# Altium PCB lighthouse_sensor.PcbDoc
Units mil, origin at the board's own origin, x right, y up, seen from the top; angles counter-clockwise.
Board outline 1300 x 600 mil, 2 copper layers (Top Layer, Bottom Layer); 50 components, 24 nets, 111 pads, 51 vias.
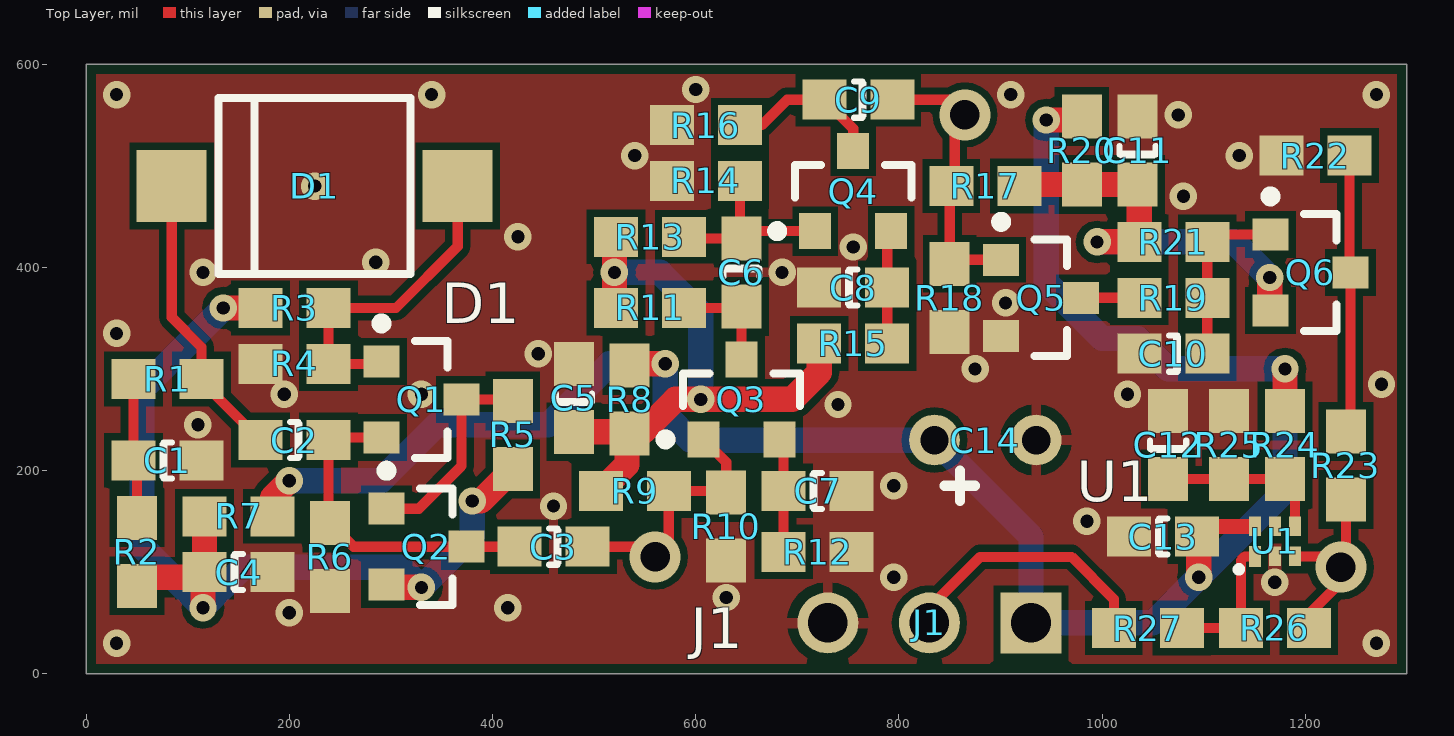
[diagram p0: Top Layer view]
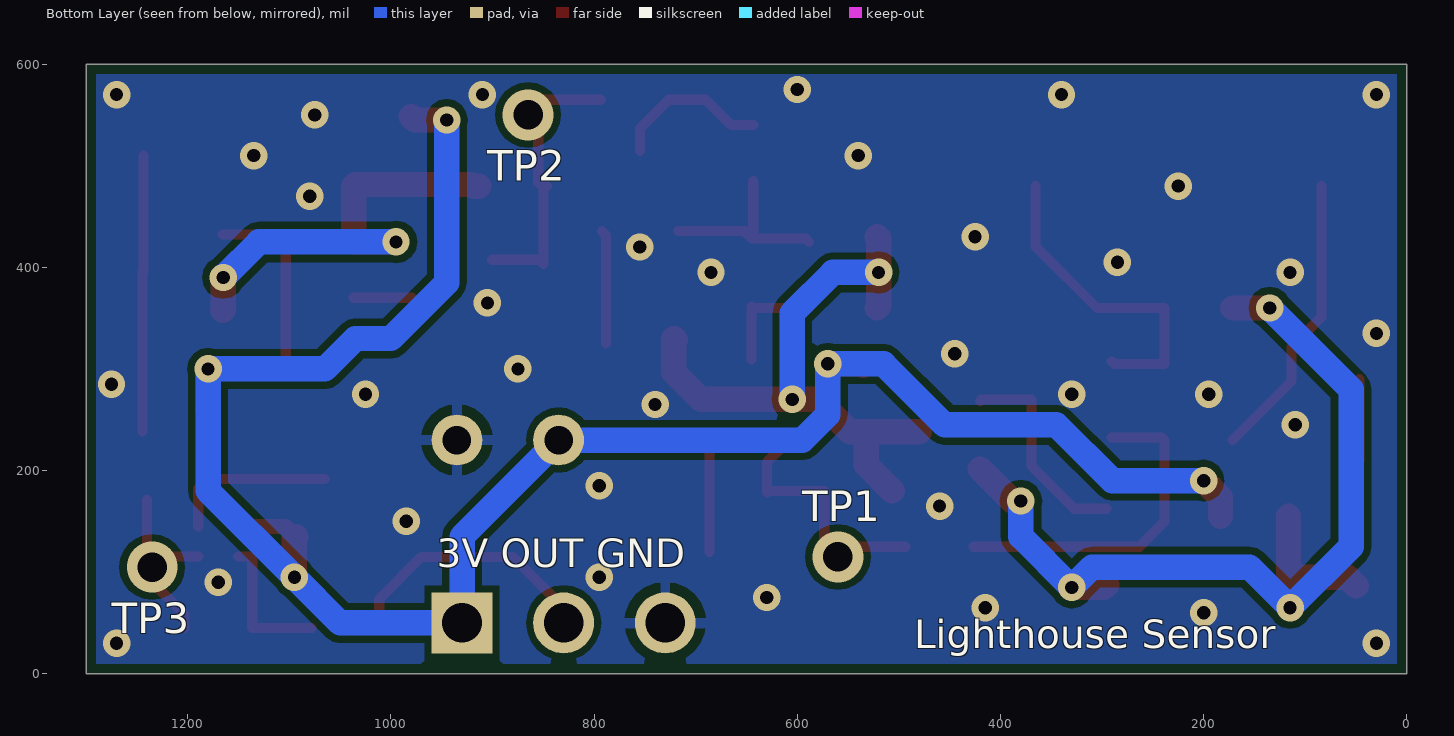
[diagram p1: Bottom Layer view, seen from below]

## Layer stack, top to bottom
Top Solder: solder mask 0.4, Solder Resist, Dk 3.5
Top Layer: signal copper 1.4
Dielectric1: dielectric 12.6, FR-4, Dk 4.8
Bottom Layer: signal copper 1.4
Bottom Solder: solder mask 0.4, Solder Resist, Dk 3.5

## Board outline
1300,0 0,0 0,600 1300,600

## Design rules (kind name [scope] priority, off if disabled: settings)
AssemblyTestPointUsage [All] p1: valid=2
Clearance [All] p1: gap=7
ComponentClearance [(Name <> 'J1') vs (Name <> 'J1')] p1: gap=5 collisioncheckmode=3 verticalgap=10 showdistances=FALSE
DiffPairsRouting [All] p1: maxlimit=7 minlimit=7 mostfreqgap=7 toplayer_minwidth=15 toplayer_maxwidth=15 toplayer_prefwidth=15 bottomlayer_minwidth=15 bottomlayer_maxwidth=15 bottomlayer_prefwidth=15 maxuncoupledlength=500
FabricationTestPointUsage [All] p1: valid=2 allowmultiple=FALSE
HoleSize [All] p1: absolutevalues=TRUE maxlimit=250 minlimit=13 maxpercent=80.000 minpercent=20.000
MinimumAnnularRing [All] p1: minimumring=7
PolygonConnect PolygonConnect_Thermal [(InComponentClass('Thermal'))] p1: connectstyle=Relief reliefconductorwidth=10 reliefentries=4 polygonreliefangle="90 Angle" airgapwidth=10
PolygonConnect [All] p2: connectstyle=Direct reliefconductorwidth=10 reliefentries=4 polygonreliefangle="90 Angle" airgapwidth=10
RoutingVias [All] p1: holewidth=13 width=27 viastyle="Through Hole" minholewidth=13 minwidth=27 maxholewidth=60 maxwidth=80
SilkToSolderMaskClearance SilkscreenOverComponentPads [IsPad] p1: minsilkscreentomaskgap=10 clearancetoexposedcopper=TRUE
SolderMaskExpansion [All] p1: expansion=4
Width [All] p1: maxlimit=60 minlimit=7 preferedwidth=7
24 further rules are at their usual default settings.

## Classes and differential pairs
component class Thermal: C14 J1

## Components (designator, comment, footprint, x,y, rotation, side; value= is the part's Value field where it differs from the comment)
C1 "C0603" 0603 80,210 r0 top
C2 "C0603" 0603 205,230 r180 top
C3 "C0603" 0603 460,125 r180 top
C4 "C0603" 0603 150,100 r0 top
C5 "C0603" 0603 480,271.54 r90 top
C6 "C0603" 0603 645,395 r270 top
C7 "C0603" 0603 720,180 r0 top
C8 "C0603" 0603 755,380 r0 top
C9 "C0603" 0603 760,565 r180 top
C10 "C0603" 0603 1070,315 r180 top
C11 "C0603" 0603 1035,515 r90 top
C12 "C0603" 0603 1065,225.24 r90 top
C13 "C0603" 0603 1060,135 r0 top
C14 "Electrolytic Capacitor" Capacitor 835,230 r0 top
D1 "VBPW34FAS" VBPW34FAS 225,480 r0 top
J1 "3P_0.1_SIP" 3P_0.1_SIP 930,50 r270 top
Q1 "MMBT3904LT3G" ONSC-SOT-23-3-318-08_V 330,270 r0 top
Q2 "MMBT3906LT3G" ONSC-SOT-23-3-318-08_V 335,125 r0 top
Q3 "MMBT3904LT3G" ONSC-SOT-23-3-318-08_V 645,270 r90 top
Q4 "MMBT3906LT3G" ONSC-SOT-23-3-318-08_V 755,475 r90 top
Q5 "MMBT3904LT3G" ONSC-SOT-23-3-318-08_V 940,370 r0 top
Q6 "MMBT3906LT3G" ONSC-SOT-23-3-318-08_V 1205,395 r0 top
R1 "10K" 3-0603 80,290 r180 top
R2 "10K" 3-0603 50,120 r90 top
R3 "8.2K" 3-0603 205,360 r180 top
R4 "8.2K" 3-0603 205,305 r0 top
R5 "1.5K" 3-0603 420,235 r270 top
R6 "560" 3-0603 240,115 r90 top
R7 "33" 3-0603 150,155 r180 top
R8 "33" 3-0603 535,270 r270 top
R9 "15K" 3-0603 540,180 r0 top
R10 "6.8K" 3-0603 630,145 r90 top
R11 "2.7K" 3-0603 555,360 r0 top
R12 "1K" 3-0603 720,120 r180 top
R13 "6.8K" 3-0603 555,430 r0 top
R14 "15K" 3-0603 610,485 r0 top
R15 "1K" 3-0603 755,325 r0 top
R16 "2.7K" 3-0603 610,540 r0 top
R17 "100K" 3-0603 885,480 r180 top
R18 "12K" 3-0603 850,370 r90 top
R19 "56K" 3-0603 1070,370 r0 top
R20 "33" 3-0603 980,515 r270 top
R21 "56K" 3-0603 1070,425 r0 top
R22 "5.6K" 3-0603 1210,510 r0 top
R23 "1.2K" 3-0603 1240,205 r90 top
R24 "100K" 3-0603 1180,225.24 r270 top
R25 "100K" 3-0603 1125,225.24 r270 top
R26 "100K" 3-0603 1170,45.24 r0 top
R27 "33" 3-0603 1045,45 r0 top
U1 "TC75S70L6X" MP6C 1170,130.24 r90 top

## Footprints (in the part's own frame and the unit in brackets; to place one, negate y for a bottom-side part, rotate by r counter-clockwise, add the part's x,y. Pads: shape width x height; smd on the part's side, far side on the other; paste and mask are expansions set on the pad)
3-0603 [mm] "Chip Resistor; Body 1.6 x 0.9 mm (LxW typ)"
  rect 1.1x1 smd: 1(-0.85,0) 2(0.85,0)
3P_0.1_SIP [mil]
  rect 60x60 hole 39: 1(0,0)
  round 60 hole 39: 2(0,-100) 3(0,-200)
0603 [mm] "Chip Capacitor; Body 1.6 x 0.8 mm (LxW typ)"
  rect 1.1x1 smd: 1(-0.85,0) 2(0.85,0)
  silkscreen extent -0.1,-0.45 0.11,0.45
Capacitor [mil]
  round 50 hole 28: 1(0,0) 2(100,0)
  silkscreen extent 10,-60 40,-30
MP6C [mm]
  rect 0.52x0.3 smd: 1(-0.375,0.5)
  rect 0.49x0.3 smd: 2(-0.375,0) 3(-0.375,-0.5) 4(0.375,-0.5) 5(0.375,0) 6(0.375,0.5)
  silkscreen extent -0.73,0.87 -0.67,0.93
ONSC-SOT-23-3-318-08_V [mm] "SOT23, 3-Leads, Body 2.92x1.3mm, Pitch 0.95mm"
  rect 0.9x0.8 smd: 1(-1,0.95) 2(-1,-0.95) 3(1,0)
  silkscreen extent -1.12,-1.46 0.65,2.02, body extent -0.65,-1.46 0.65,1.46, height 1.11
VBPW34FAS [mm]
  rect 1.75x1.8 smd: 1(-3.575,0) 2(3.575,0)
  silkscreen extent -2.4,-2.2 2.4,2.2

## Part data
C1 C2 C3 C4 C5 C6 C7 C8 C9 C10 C11 C12 C13: "Ceramic Chip Capacitor - Standard"
D1: "Silicon PIN Photodiode"
J1: "1x3 0.1\" PTH Header"
Q1 Q3 Q5: "General Purpose Transistor, NPN Silicon, 3-Pin SOT-23, Pb-Free, Tape and Reel"
Q2 Q4 Q6: "General Purpose Transistor, PNP Silicon, 3-Pin SOT-23, Pb-Free, Tape and Reel"
R1 R2 R3 R4 R5 R6 R7 R8 R9 R10 R11 R12 R13 R14 R15 R16 R17 R18 R19 R20 R21 R22 R23 R24 R25 R26 R27: library part ERJ3EK, "Precision Thick Film Chip Resistor, 10 Ohm to 1M Ohm Range, 1% and 0.5% Tolerance, 0603 Size, 0.063 W"
U1: "Single Comparator"

## Via types
v1: diameter 27, hole 13, Top Layer to Bottom Layer, tented both sides, 48 vias
v2: diameter 50, hole 29, Top Layer to Bottom Layer, 3 vias

## Nets (pads, with @x,y where several pads share a name; then routed paths per layer and width w, separated by ;. In a path a pad name is that pad's centre, name@x,y a point inside that pad or via, vN(x,y) a via of type N, cw(c..) or ccw(c..) an arc to the next point about the centre after c; other vN are vias at no path point)
GND: C1.2 C4.2 C5.2 C7.2 C8.1 C10.2 C11.2 C12.2 C13.1 C14.2 J1.3 Q5.2 R4.1 R6.1 R10.1 R12.1 R14.1 R16.1 R18.1 R22.1 R25.1 U1.2
  other v1: 30,30 1270,30 200,60 415,65 630,75 1170,90 795,95 985,150 460,165 795,185 110,245 740,265 195,275 330,275 1025,275 1275,285 875,300 445,315 30,335 905,365 115,395 685,395 285,405 755,420 425,430 1080,470 225,480 540,510 1135,510 1075,550 30,570 340,570 910,570 1270,570 600,575
NetC1_1: C1.1 R1.2 R2.2 | length 138
  Top Layer w10: R1.2 C1.1 50,206.54 R2.2
NetC2_1: C2.1 C3.2 Q1.2 Q2.3 R6.2 | length 331.7
  Top Layer w10: Q1.2 241.06,232.6 C2.1 238.46,150 R6.2 263.46,125 Q2.3 C3.2
NetC2_2: C2.2 D1.1 R1.1 | length 286.2
  Top Layer w10: D1.1 84.25,350.75 113.46,321.54 R1.1 113.46,288.07 C2.2
NetC3_1: C3.1 Q3.1 R9.2 R10.2 | length 259.9
  Top Layer w10: C3.1 550,125 v2(560,115) 573.46,128.46 R9.2 628.46,180 R10.2 630,208.23 Q3.1
NetC4_1: C4.1 Q2.2 R2.1 R3.2 R5.2 R7.2 | length 984.2
  Top Layer w25: R2.1 58.46,95 111.54,95 C4.1@115,98.46 ; v1(115,65) C4.1@115,98.46 ; R7.2 C4.1 C4.1@115,98.46 ; v1(135,360) R3.2 ; Q2.2 298.23,85 v1(330,85) ; v1(380,170) 388.46,170 R5.2
  Bottom Layer w25: v1(135,360) 55,280 55,125 v1(115,65) 155,105 310,105 v1(330,85) 380,135 v1(380,170)
NetC5_1: C5.1 R8.2 R9.1 R11.1 R13.1 R15.1 | length 624.1
  Top Layer w25: C5.1 548.07,238.07 580,270 v1(605,270) 695,270 721.54,296.54 R15.1 ; R9.1 532.31,205.78 532.31,236.54 R8.2 ; R11.1 520,361.54 v1(520,395) 520,428.46 R13.1 ; R15.1@720,328.46 R15.1@721.54,330
  Bottom Layer w25: v1(520,395) 565,395 605,355 v1(605,270)
NetC6_1: C6.1 Q4.1 R13.2 R14.2 | length 190.7
  Top Layer w10: R13.2@588.46,425 591.93,428.46 C6.1 ; R14.2 643.46,430 C6.1 ; Q4.1 652.17,435.63 C6.1
NetC6_2: C6.2 Q3.3 R11.2 | length 109.3
  Top Layer w10: R11.2 643.46,360 C6.2 Q3.3
NetC7_1: C7.1 Q3.2 R12.2 | length 112.3
  Top Layer w10: Q3.2 686.54,226.5 C7.1 R12.2
NetC8_2: C8.2 Q4.2 R15.2 | length 112.3
  Top Layer w10: R15.2 788.46,385 788.46,431.69 Q4.2
NetC9_1: C9.1 Q5.1 R17.2 R18.2 | length 283.6
  Top Layer w10: C9.1 850,565 v2(865,550) 855,540 855,483.46 R17.2 ; R17.2@846.54,480 850,476.54 R18.2 853.94,407.4 Q5.1
NetC9_2: C9.2 Q4.3 R16.2 | length 155.8
  Top Layer w10: R16.2 665,540 690,565 C9.2 755,536.54 Q4.3
NetC10_1: C10.1 Q6.1 R19.2 R21.2 | length 175.2
  Top Layer w10: C10.1 R21.2 1110.87,432.4 Q6.1
NetC11_1: C11.1 Q6.2 R17.1 R20.2 R21.1 | length 438
  Top Layer w25: R17.1@913.46,480 R17.1 920,481.54 R20.2 C11.1 1036.54,480 R21.1 v1(995,425) ; v1(1165,390) 1165,358.23 Q6.2
  Bottom Layer w25: v1(995,425) 1130,425 v1(1165,390)
NetC12_1: C12.1 R24.2 R25.2 U1.4 | length 165.8
  Top Layer w10: C12.1 R25.2 R24.2 1189.68,182.09 U1.4
NetD1_2: D1.2 Q1.1 R3.1 R4.2 | length 319.9
  Top Layer w10: Q1.1 288.23,305 R4.2 R3.1 305,360 365.75,420.75 D1.2
NetJ1_2: J1.2 R27.1 | length 262.9
  Top Layer w10: J1.2 830,65 880,115 970,115 1011.54,73.46 R27.1
NetQ1_3: Q1.3 Q2.1 R5.1 | length 208
  Top Layer w10: Q2.1 327.4,162.4 369.37,204.37 Q1.3 418.46,270 R5.1
NetQ5_3: Q5.3 R19.1 | length 57.2
  Top Layer w10: Q5.3 R19.1
NetQ6_3: Q6.3 R22.2 R23.2 | length 271.9
  Top Layer w10: R22.2 1243.46,395.91 Q6.3 R23.2@1244.37,238.46
NetR23_1: R23.1 R26.2 U1.3 | length 191.1
  Top Layer w10: U1.3 1224.53,115.47 v2(1235,105) ; R26.2 1203.46,58.46 1235,90 v2(1235,105) ; R23.1 1240,110 v2(1235,105)
NetR26_1: R26.1 R27.2 U1.1 | length 139.9
  Top Layer w10: R27.2 1136.3,45 R26.1 1136.54,111.54 1140.47,115.47 U1.1
VCC: C13.2 C14.1 J1.1 R7.1 R8.1 R20.1 R24.1 U1.6 | length 2071.9
  Top Layer w15: C13.2 1103.46,145 U1.6@1149,145
  Top Layer w25: R7.1 183.46,173.46 v1(200,190) ; R8.1 536.54,305 v1(570,305) ; v1(945,545) 976.54,545 R20.1 ; C13.2 1095,133.46 v1(1095,95) ; R24.1 v1(1180,300)
  Bottom Layer w25: v1(200,190) 290,190 345,245 455,245 515,305 v1(570,305) 570,255 595,230 C14.1 930,135 J1.1 1050,50 v1(1095,95) 1180,180 v1(1180,300) 1065,300 1035,330 1000,330 945,385 v1(945,545)
pads on no net: U1.5

## Polygon pours and split planes (outlines as drawn)
GND on Top Layer "GND Pour" (solid, remove dead copper, pour order 6): 10,590 10,10 1290,10 1290,590
GND on Bottom Layer "GND Pour" (solid, remove dead copper, pour order 4): 10,590 10,10 1290,10 1290,590

## Silkscreen, mask and mechanical layers (free items; w line width, h text height)
Top Overlay:
  text "D1" at 350,345 h40
  text "U1" at 975,170 h40
  text "J1" at 595,25 h40
Bottom Overlay:
  text "TP2" at 905,485 h30
  text "TP1" at 595,150 h30
  text "3V OUT GND" at 955,105 h28
  text "TP3" at 1275,40 h30
  text "Lighthouse Sensor" at 485,25 h28
Mechanical 2:
  the board outline again, w10